# Altium PCB SB0037A.PcbDoc (part 3 of 7)
Units mil, origin at the board's own origin, x right, y up, seen from the top; angles counter-clockwise.
Board outline 2872.5 x 4560 mil, 6 copper layers (Top Layer, L2, L3, L4, L5, Bottom Layer), stack 30.268 mil thick; 282 components, 292 nets, 1320 pads, 687 vias.
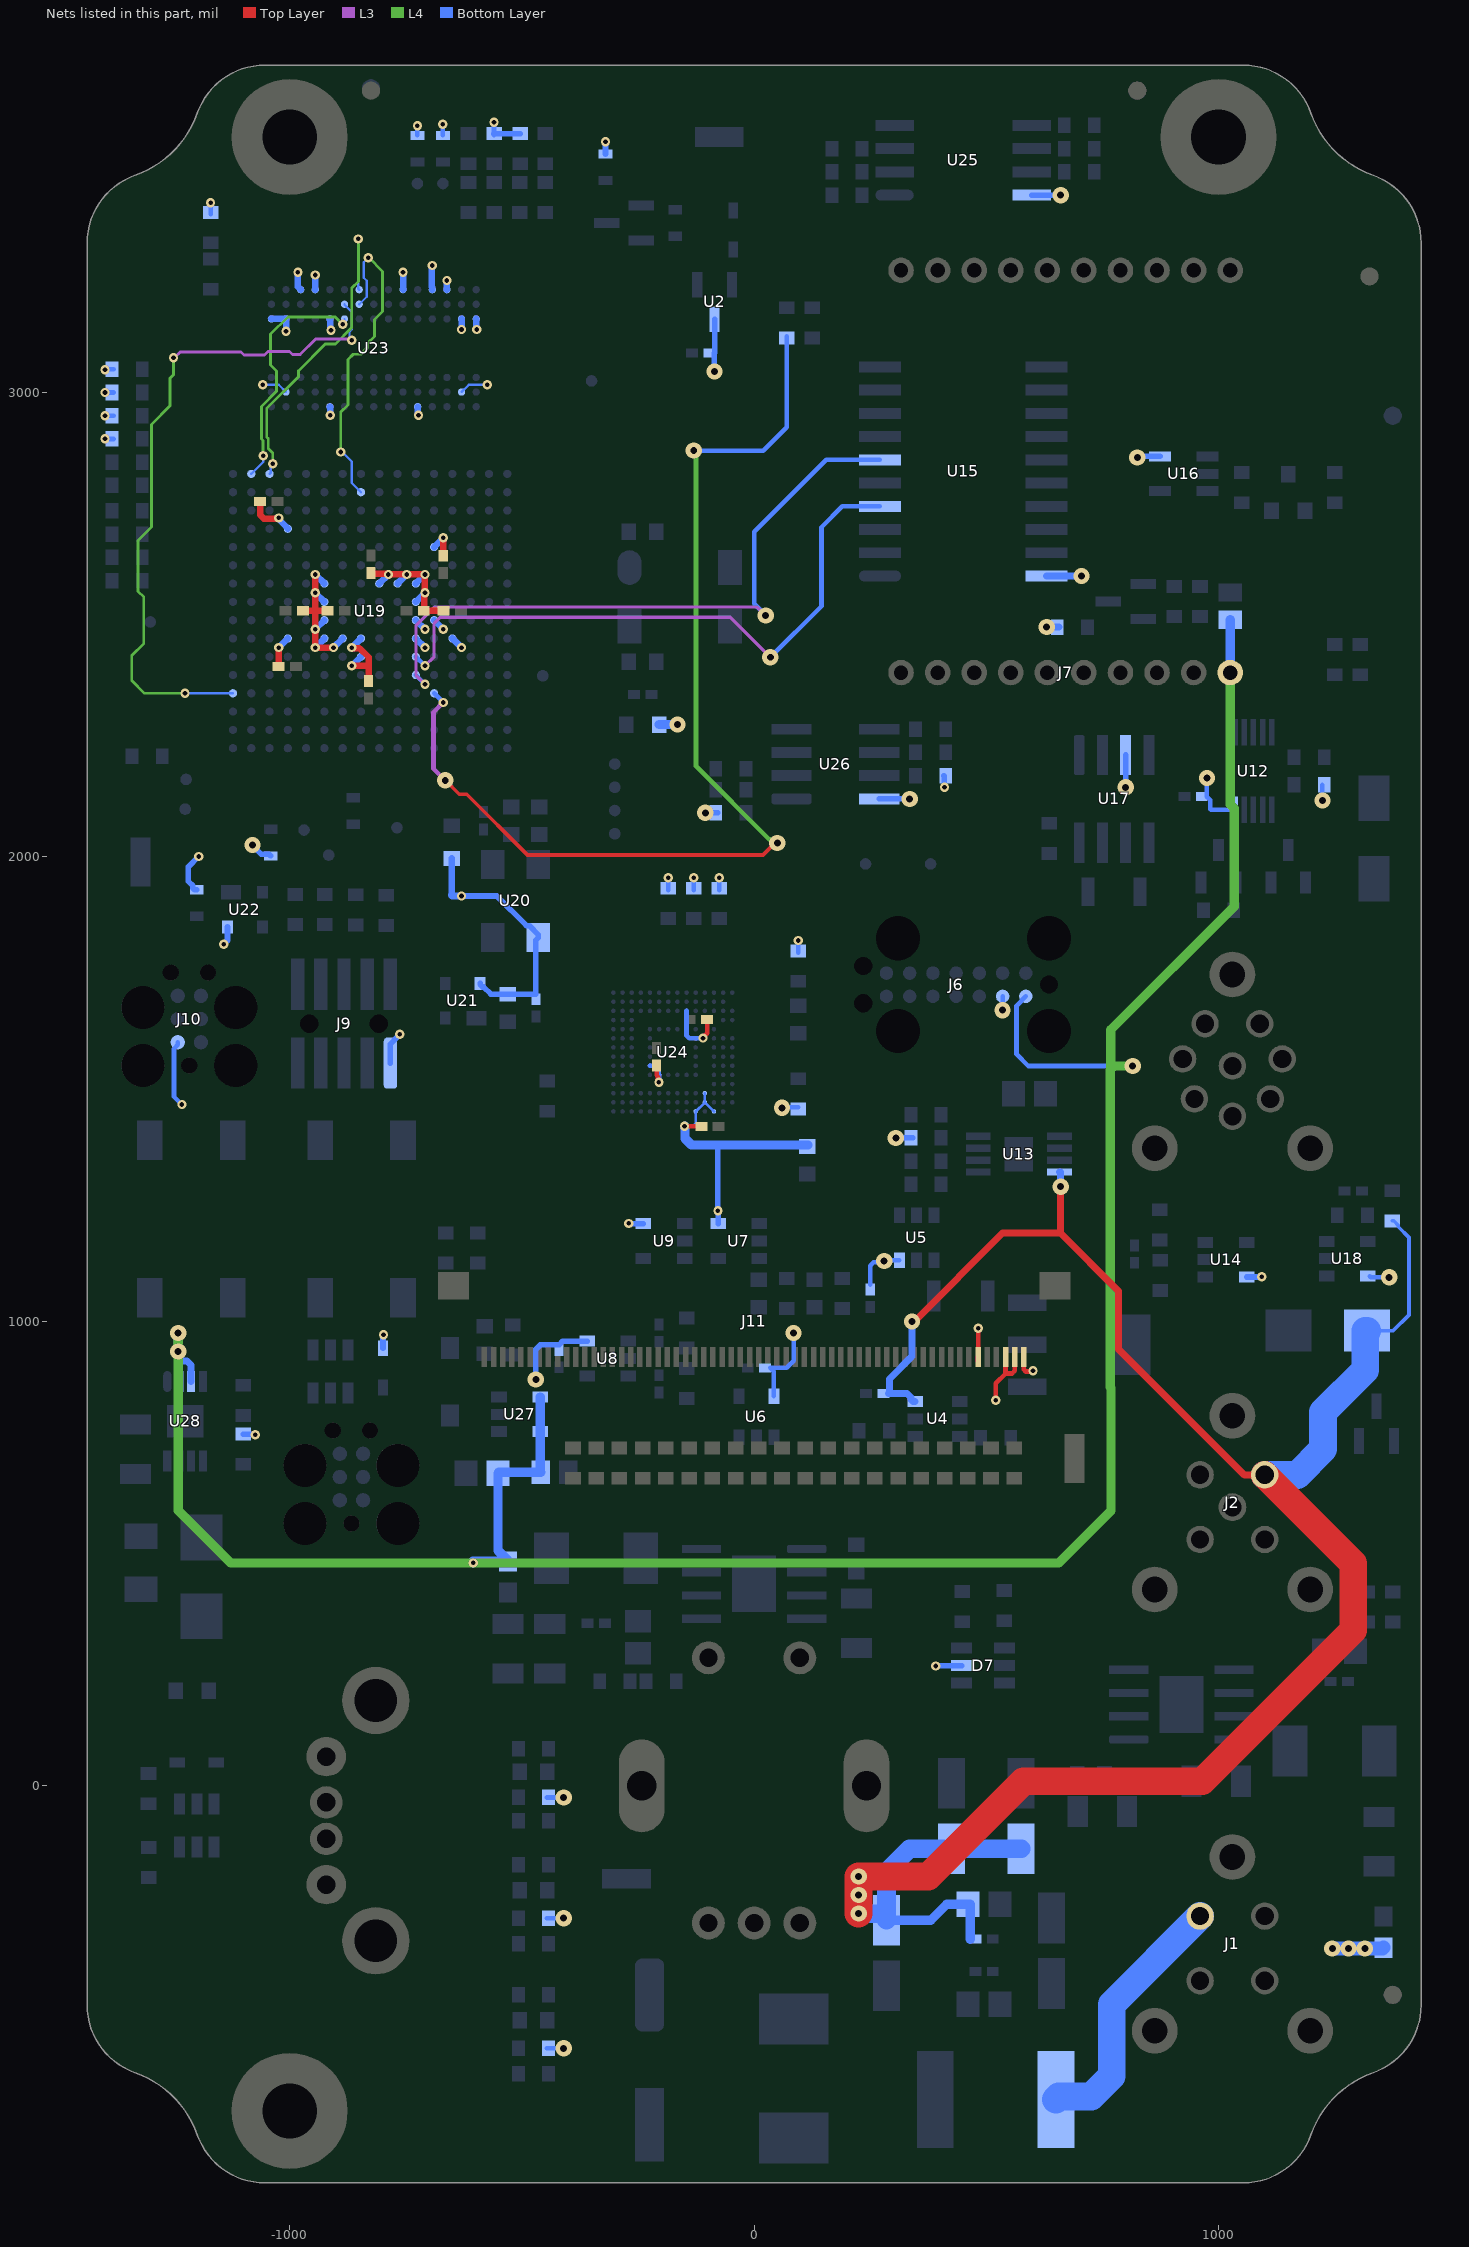
[diagram p6: the nets of this part, all layers, seen from the top]

## Part data (continued)
R10 R11 R15 R19 R21 R22 R23 R24 R27 R29 R40 R41 R42 R43 R45 R46 R47 R49 R50 R75 R76 R77 R78 R79 R80 R81 R89 R90 R118 R119: library part ERJ-3EKF1002V, "RES 10K OHM 1/10W 1% 0603 SMD", Limiting Element Voltage=75, Manufacturer="Panasonic Electronic Components", Maximum Overload Voltage=150, Maximum Working Voltage=31.6V, Package="0603 (1608 Metric)", Package Power="0603  (0.1W)", Power (Watts)="0.1W- 1/10W", Ratings=AEC-Q200, Sort Value=10000, Sort Value Package=603_10000, Supplier Package=0603, Supplier Part Number 1=P10.0KHCT-ND, Temperature Coefficient=±100ppm/°C, Tolerance=±1%, Category=Resistors, ComponentLink1Description="Internal Datasheet", ComponentLink1URL="datasheets\Panasonic Electronic Components\AOA0000CE2.pdf", ComponentLink2Description="External Datasheet", ComponentLink2URL=http://industrial.panasonic.com/www-data/pdf/AOA0000/AOA0000CE2.pdf, Composition="Thick Film", Features=-, Height=0.55MM, Manufacturer Part Number=ERJ-3EKF1002V, Number of Terminations=2, Packaging="Cut Tape (CT)", Resistance (Ohms)=10k, Size / Dimension="0.063\" L x 0.031\" W (1.60mm x 0.80mm)", Substitution Notes="10k , ±1% , 0603 , AEC-Q200", Supplier 1=Digi-Key
R12 R25 R26 R28: library part ERJ-3EKF1000V, "RES 100 OHM 1/10W 1% 0603 SMD", Limiting Element Voltage=75, Manufacturer="Panasonic Electronic Components", Maximum Overload Voltage=150, Maximum Working Voltage=3.2V, Package="0603 (1608 Metric)", Package Power="0603  (0.1W)", Power (Watts)="0.1W- 1/10W", Ratings=AEC-Q200, Sort Value Package=603_100, Supplier Package=0603, Supplier Part Number 1=P100HCT-ND, Temperature Coefficient=±100ppm/°C, Tolerance=±1%, Category=Resistors, ComponentLink1Description="Internal Datasheet", ComponentLink1URL="datasheets\Panasonic Electronic Components\AOA0000CE2.pdf", ComponentLink2Description="External Datasheet", ComponentLink2URL=http://industrial.panasonic.com/www-data/pdf/AOA0000/AOA0000CE2.pdf, Composition="Thick Film", Features=-, Height=0.55MM, Manufacturer Part Number=ERJ-3EKF1000V, Number of Terminations=2, Packaging="Cut Tape (CT)", Resistance (Ohms)=100, Size / Dimension="0.063\" L x 0.031\" W (1.60mm x 0.80mm)", Sort Value=100, Substitution Notes="100 , ±1% , 0603 , AEC-Q200", Supplier 1=Digi-Key
R16 R17 R68 R69 R70 R71 R72: library part ERJ-3EKF4701V, "RES 4.7K OHM 1/10W 1% 0603 SMD", Limiting Element Voltage=75, Manufacturer="Panasonic Electronic Components", Maximum Overload Voltage=150, Maximum Working Voltage=21.7V, Package="0603 (1608 Metric)", Package Power="0603  (0.1W)", Power (Watts)="0.1W- 1/10W", Ratings=AEC-Q200, Sort Value=4700, Sort Value Package=603_4700, Supplier Package=0603, Supplier Part Number 1=P4.70KHCT-ND, Temperature Coefficient=±100ppm/°C, Tolerance=±1%, Category=Resistors, ComponentLink1Description="Internal Datasheet", ComponentLink1URL="datasheets\Panasonic Electronic Components\AOA0000CE2.pdf", ComponentLink2Description="External Datasheet", ComponentLink2URL=http://industrial.panasonic.com/www-data/pdf/AOA0000/AOA0000CE2.pdf, Composition="Thick Film", Features=-, Height=0.55MM, Manufacturer Part Number=ERJ-3EKF4701V, Number of Terminations=2, Packaging="Cut Tape (CT)", Resistance (Ohms)=4.7k, Size / Dimension="0.063\" L x 0.031\" W (1.60mm x 0.80mm)", Substitution Notes="4.7k , ±1% , 0603 , AEC-Q200", Supplier 1=Digi-Key
R18: library part ERJ-3EKF3921V, "RES 3.92K OHM 1/10W 1% 0603 SMD", Limiting Element Voltage=75, Manufacturer="Panasonic Electronic Components", Maximum Overload Voltage=150, Maximum Working Voltage=19.8V, Package="0603 (1608 Metric)", Package Power="0603  (0.1W)", Power (Watts)="0.1W- 1/10W", Ratings=AEC-Q200, Sort Value=3920, Sort Value Package=603_3920, Supplier Package=0603, Supplier Part Number 1=P3.92KHCT-ND, Temperature Coefficient=±100ppm/°C, Tolerance=±1%, Category=Resistors, ComponentLink1Description="Internal Datasheet", ComponentLink1URL="datasheets\Panasonic Electronic Components\AOA0000CE2.pdf", ComponentLink2Description="External Datasheet", ComponentLink2URL=http://industrial.panasonic.com/www-data/pdf/AOA0000/AOA0000CE2.pdf, Composition="Thick Film", Features=-, Height=0.55MM, Manufacturer Part Number=ERJ-3EKF3921V, Number of Terminations=2, Packaging="Cut Tape (CT)", Resistance (Ohms)=3.92k, Size / Dimension="0.063\" L x 0.031\" W (1.60mm x 0.80mm)", Substitution Notes="3.92k , ±1% , 0603 , AEC-Q200", Supplier 1=Digi-Key
R39: library part ERJ-8ENF1200V, "RES 120 OHM 1/4W 1% 1206 SMD", Limiting Element Voltage=200, Manufacturer="Panasonic Electronic Components", Maximum Overload Voltage=400, Maximum Working Voltage=5.5V, Package="1206 (3216 Metric)", Package Power="1206  (0.25W)", Power (Watts)="0.25W- 1/4W", Ratings=AEC-Q200, Sort Value Package=1206_120, Supplier Package=1206, Supplier Part Number 1=P120FCT-ND, Temperature Coefficient=±100ppm/°C, Tolerance=±1%, Category=Resistors, ComponentLink1Description="Internal Datasheet", ComponentLink1URL="datasheets\Panasonic Electronic Components\AOA0000CE2.pdf", ComponentLink2Description="External Datasheet", ComponentLink2URL=http://industrial.panasonic.com/www-data/pdf/AOA0000/AOA0000CE2.pdf, Composition="Thick Film", Features=-, Height=0.70MM, Manufacturer Part Number=ERJ-8ENF1200V, Number of Terminations=2, Packaging="Cut Tape (CT)", Resistance (Ohms)=120, Size / Dimension="0.126\" L x 0.063\" W (3.20mm x 1.60mm)", Sort Value=120, Substitution Notes="120 , ±1% , 1206 , AEC-Q200", Supplier 1=Digi-Key
R48: library part ERJ-3EKF1202V, "RES 12K OHM 1/10W 1% 0603 SMD", Limiting Element Voltage=75, Manufacturer="Panasonic Electronic Components", Maximum Overload Voltage=150, Maximum Working Voltage=34.6V, Package="0603 (1608 Metric)", Package Power="0603  (0.1W)", Power (Watts)="0.1W- 1/10W", Ratings=AEC-Q200, Sort Value=12000, Sort Value Package=603_12000, Supplier Package=0603, Supplier Part Number 1=P12.0KHCT-ND, Temperature Coefficient=±100ppm/°C, Tolerance=±1%, Category=Resistors, ComponentLink1Description="Internal Datasheet", ComponentLink1URL="datasheets\Panasonic Electronic Components\AOA0000CE2.pdf", ComponentLink2Description="External Datasheet", ComponentLink2URL=http://industrial.panasonic.com/www-data/pdf/AOA0000/AOA0000CE2.pdf, Composition="Thick Film", Features=-, Height=0.55MM, Manufacturer Part Number=ERJ-3EKF1202V, Number of Terminations=2, Packaging="Cut Tape (CT)", Resistance (Ohms)=12k, Size / Dimension="0.063\" L x 0.031\" W (1.60mm x 0.80mm)", Substitution Notes="12k , ±1% , 0603 , AEC-Q200", Supplier 1=Digi-Key
R51 R52 R53 R54 R117: library part ERJ-3EKF2201V, "RES 2.2K OHM 1/10W 1% 0603 SMD", Limiting Element Voltage=75, Manufacturer="Panasonic Electronic Components", Maximum Overload Voltage=150, Maximum Working Voltage=14.8V, Package="0603 (1608 Metric)", Package Power="0603  (0.1W)", Power (Watts)="0.1W- 1/10W", Ratings=AEC-Q200, Sort Value=2200, Sort Value Package=603_2200, Supplier Package=0603, Supplier Part Number 1=P2.20KHCT-ND, Temperature Coefficient=±100ppm/°C, Tolerance=±1%, Category=Resistors, ComponentLink1Description="Internal Datasheet", ComponentLink1URL="datasheets\Panasonic Electronic Components\AOA0000CE2.pdf", ComponentLink2Description="External Datasheet", ComponentLink2URL=http://industrial.panasonic.com/www-data/pdf/AOA0000/AOA0000CE2.pdf, Composition="Thick Film", Features=-, Height=0.55MM, Manufacturer Part Number=ERJ-3EKF2201V, Number of Terminations=2, Packaging="Cut Tape (CT)", Resistance (Ohms)=2.2k, Size / Dimension="0.063\" L x 0.031\" W (1.60mm x 0.80mm)", Substitution Notes="2.2k , ±1% , 0603 , AEC-Q200", Supplier 1=Digi-Key
R83 R84 R85 R86 R87 R88 R91 R92 R93 R94: library part ERJ-3EKF33R0V, "RES 33 OHM 1/10W 1% 0603 SMD", Limiting Element Voltage=75, Manufacturer="Panasonic Electronic Components", Maximum Overload Voltage=150, Maximum Working Voltage=1.8V, Package="0603 (1608 Metric)", Package Power="0603  (0.1W)", Power (Watts)="0.1W- 1/10W", Ratings=AEC-Q200, Sort Value Package=603_33, Supplier Package=0603, Supplier Part Number 1=P33.0HCT-ND, Temperature Coefficient=±100ppm/°C, Tolerance=±1%, Category=Resistors, ComponentLink1Description="Internal Datasheet", ComponentLink1URL="datasheets\Panasonic Electronic Components\AOA0000CE2.pdf", ComponentLink2Description="External Datasheet", ComponentLink2URL=http://industrial.panasonic.com/www-data/pdf/AOA0000/AOA0000CE2.pdf, Composition="Thick Film", Features=-, Height=0.55MM, Manufacturer Part Number=ERJ-3EKF33R0V, Number of Terminations=2, Packaging="Cut Tape (CT)", Resistance (Ohms)=33, Size / Dimension="0.063\" L x 0.031\" W (1.60mm x 0.80mm)", Sort Value=33, Substitution Notes="33 , ±1% , 0603 , AEC-Q200", Supplier 1=Digi-Key
R95 R96 R97 R98 R99 R100 R101 R102 R103 R104 R105 R106 R107 R108 R109 R110 R111 R112 R113 R114: library part ERJ-3EKF51R0V, "RES 51 OHM 1/10W 1% 0603 SMD", Limiting Element Voltage=75, Manufacturer="Panasonic Electronic Components", Maximum Overload Voltage=150, Maximum Working Voltage=2.3V, Package="0603 (1608 Metric)", Package Power="0603  (0.1W)", Power (Watts)="0.1W- 1/10W", Ratings=AEC-Q200, Sort Value Package=603_51, Supplier Package=0603, Supplier Part Number 1=P51.0HCT-ND, Temperature Coefficient=±100ppm/°C, Tolerance=±1%, Category=Resistors, ComponentLink1Description="Internal Datasheet", ComponentLink1URL="datasheets\Panasonic Electronic Components\AOA0000CE2.pdf", ComponentLink2Description="External Datasheet", ComponentLink2URL=http://industrial.panasonic.com/www-data/pdf/AOA0000/AOA0000CE2.pdf, Composition="Thick Film", Features=-, Height=0.55MM, Manufacturer Part Number=ERJ-3EKF51R0V, Number of Terminations=2, Packaging="Cut Tape (CT)", Resistance (Ohms)=51, Size / Dimension="0.063\" L x 0.031\" W (1.60mm x 0.80mm)", Sort Value=51, Substitution Notes="51 , ±1% , 0603 , AEC-Q200", Supplier 1=Digi-Key
R115: library part ERJ-3EKF15R0V, "RES 15 OHM 1/10W 1% 0603 SMD", Limiting Element Voltage=75, Manufacturer="Panasonic Electronic Components", Maximum Overload Voltage=150, Maximum Working Voltage=1.2V, Package="0603 (1608 Metric)", Package Power="0603  (0.1W)", Power (Watts)="0.1W- 1/10W", Ratings=AEC-Q200, Sort Value Package=603_15, Supplier Package=0603, Supplier Part Number 1=P15.0HCT-ND, Temperature Coefficient=±100ppm/°C, Tolerance=±1%, Category=Resistors, ComponentLink1Description="Internal Datasheet", ComponentLink1URL="datasheets\Panasonic Electronic Components\AOA0000CE2.pdf", ComponentLink2Description="External Datasheet", ComponentLink2URL=http://industrial.panasonic.com/www-data/pdf/AOA0000/AOA0000CE2.pdf, Composition="Thick Film", Features=-, Height=0.55MM, Manufacturer Part Number=ERJ-3EKF15R0V, Number of Terminations=2, Packaging="Cut Tape (CT)", Resistance (Ohms)=15, Size / Dimension="0.063\" L x 0.031\" W (1.60mm x 0.80mm)", Sort Value=15, Substitution Notes="15 , ±1% , 0603 , AEC-Q200", Supplier 1=Digi-Key
R120 R121: library part ERJ-3EKF1502V, "RES 15K OHM 1/10W 1% 0603 SMD", Limiting Element Voltage=75, Manufacturer="Panasonic Electronic Components", Maximum Overload Voltage=150, Maximum Working Voltage=38.7V, Package="0603 (1608 Metric)", Package Power="0603  (0.1W)", Power (Watts)="0.1W- 1/10W", Ratings=AEC-Q200, Sort Value=15000, Sort Value Package=603_15000, Supplier Package=0603, Supplier Part Number 1=P15.0KHCT-ND, Temperature Coefficient=±100ppm/°C, Tolerance=±1%, Category=Resistors, ComponentLink1Description="Internal Datasheet", ComponentLink1URL="datasheets\Panasonic Electronic Components\AOA0000CE2.pdf", ComponentLink2Description="External Datasheet", ComponentLink2URL=http://industrial.panasonic.com/www-data/pdf/AOA0000/AOA0000CE2.pdf, Composition="Thick Film", Features=-, Height=0.55MM, Manufacturer Part Number=ERJ-3EKF1502V, Number of Terminations=2, Packaging="Cut Tape (CT)", Resistance (Ohms)=15k, Size / Dimension="0.063\" L x 0.031\" W (1.60mm x 0.80mm)", Substitution Notes="15k , ±1% , 0603 , AEC-Q200", Supplier 1=Digi-Key
TP1 TP2 TP7 TP8 TP9 TP10 TP11 TP12 TP13 TP14 TP15 TP16 TP17 TP18 TP19 TP20: library part "TP SMT 25MIL"
TP3 TP4 TP5 TP6: library part 5015, Color=-, Manufacturer="Keystone Electronics", Supplier Part Number 1=36-5015CT-ND, Category="Test and Measurement", ComponentLink1Description=http://mail.keyelco.com/ENG._DEPT/PDF%20CAT%20NO%20Drawings/5015.pdf, ComponentLink1URL=http://mail.keyelco.com/ENG._DEPT/PDF%20CAT%20NO%20Drawings/5015.pdf, Manufacturer Part Number=5015, Material="Phosphor Bronze", Mounting Type="Surface Mount", Packaging="Cut Tape (CT)", RoHS="RoHS Compliant", Supplier 1=Digi-Key, Terminal="0.010\" (0.25mm) Phosphor Bronze, Silver Plate", Type="PC Test Point, Miniature"
U1 U3: "SIMPLE SWITCHER® 3.8V to 36V, 3A Synchronous Buck Converter With Ultra-Low EMI 8-SO PowerPAD -40 to 125", Manufacturer="Texas Instruments", Max Input Voltage=36V, Max Operating Temperature=125°C, Max Output Voltage=24V, Min Input Voltage=3.8V, Min Operating Temperature=-40°C, Min Output Voltage=1V, Output Current=3A, Supplier Part Number 1=296-49765-1-ND, Switching Frequency=1.4MHz, Category="Integrated Circuits", CategorySort=600, ComponentLink1Description=http://www.ti.com/lit/ds/symlink/lmr33630.pdf?src-supplier=Digi-Key, ComponentLink1URL=http://www.ti.com/lit/ds/symlink/lmr33630.pdf?src-supplier=Digi-Key, ComponentLink2Description=http://www.ti.com/general/docs/suppproductinfo.tsp?distId=10&amp;gotoUrl=http%3A%2F%2Fwww.ti.com%2Flit%2Fgpn%2Flmr33630&src-supplier=Digi-Key, ComponentLink2URL=http://www.ti.com/general/docs/suppproductinfo.tsp?distId=10&amp;gotoUrl=http%3A%2F%2Fwww.ti.com%2Flit%2Fgpn%2Flmr33630&src-supplier=Digi-Key, Manufacturer Part Number=LMR33630BDDAR, Mount="Surface Mount", Number of Outputs=1, Number of Pins=8, Output Configuration=Positive, Output Type=Adjustable, Packaging 1="Tape and Reel", Pricing 1="1=2.21000, 10=1.98800, 25=1.87520, 100=1.50000, 250=1.31252, 500=1.27500, 1000=1.01250 (USD)", RoHS=No, Stock 1=1151, Supplier 1=Digi-Key, Synchronous Rectifier=Yes
U2: "IC SUPERVISOR 2.70V HIGH SOT23", Manufacturer="Microchip Technology", Number of Voltages Monitored=1, Operating Temperature="-40°C ~ 85°C", Package="SOT-23-3, TO-236-3, Micro3™, SSD3, SST3", Supplier Part Number 1=MCP810T-270I/TTCT-ND, Voltage - Threshold=2.625V, Category="Integrated Circuits", CategorySort=600, ComponentLink1Description=http://ww1.microchip.com/downloads/en/DeviceDoc/11194c.pdf, ComponentLink1URL=http://ww1.microchip.com/downloads/en/DeviceDoc/11194c.pdf, Manufacturer Part Number=MCP810T-270I/TT, Mounting Type="Surface Mount", Output="Push-Pull, Totem Pole", Packaging="Cut Tape (CT)", Pricing 1="1=0.54, 10=0.45, 25=0.37, 100=0.34 (USD)", Reset="Active High", Reset Timeout="150 ms Minimum", RoHS="RoHS Compliant", Stock 1=6831, Supplier 1=Digi-Key, Type="Simple Reset/Power-On Reset"
U4: "IC GATE DRVR IGBT/MOSFET SOT23-6", Current - Peak Output (Source, Sink)="2.5A, 5A", Logic Voltage - VIL, VIH="1.2V, 2.2V", Manufacturer="Texas Instruments", Operating Temperature="-40°C ~ 140°C (TJ)", Package / Case=SOT-23-6, Supplier Part Number 1=296-35613-1-ND, Voltage - Supply="10 V ~ 32 V", Category="Integrated Circuits (ICs)", Channel Type=Single, ComponentLink1Description=http://www.ti.com/lit/ds/symlink/ucc27531.pdf, ComponentLink1URL=http://www.ti.com/lit/ds/symlink/ucc27531.pdf, Driven Configuration="High-Side or Low-Side", Gate Type="IGBT, N-Channel MOSFET", Input Type=Non-Inverting, Manufacturer Part Number=UCC27531DBVT, Mounting Type="Surface Mount", Packaging="Cut Tape (CT)", Part Status=Active, Pricing 1="1=2.36, 10=2.121, 100=1.7047 (USD)", Rise / Fall Time (Typ)="15ns, 7ns", RoHS="RoHS Compliant", Stock 1=1544, Supplier 1=Digi-Key, Supplier Device Package=SOT-23-6
U5: "IC OPAMP CURR SENSE 6SOT", Case/Package=SOT-23-6, Input Bias Current=13uA, Input Offset Voltage (Vos)=900uV, Manufacturer="TI National Semiconductor", Max Operating Temperature=125°C, Max Supply Voltage=12V, Min Operating Temperature=-40°C, Min Supply Voltage=2.7V, Operating Supply Current=2.3mA, Package Quantity=1, Power Supply Rejection Ratio (PSRR)=85dB, Supplier Part Number 1=LMP8640MK-T/NOPBCT-ND, Voltage Gain=26.02dB, Bandwidth=950kHz, Common Mode Rejection Ratio=60dB, ComponentLink1Description=https://datasheet.ciiva.com/2965/lmp8640-2965988.pdf?src-supplier=Avnet, ComponentLink1URL=https://datasheet.ciiva.com/2965/lmp8640-2965988.pdf?src-supplier=Avnet, ComponentLink2Description=https://datasheet.ciiva.com/1802/lmp8640-1802437.pdf?src-supplier=Digi-Key, ComponentLink2URL=https://datasheet.ciiva.com/1802/lmp8640-1802437.pdf?src-supplier=Digi-Key, ComponentLink3Description=https://datasheet.ciiva.com/1802/lmp8640-1802438.pdf?src-supplier=Digi-Key, ComponentLink3URL=https://datasheet.ciiva.com/1802/lmp8640-1802438.pdf?src-supplier=Digi-Key, ComponentLink4Description=https://datasheet.ciiva.com/1802/lmp8640-1802439.pdf?src-supplier=Digi-Key, ComponentLink4URL=https://datasheet.ciiva.com/1802/lmp8640-1802439.pdf?src-supplier=Digi-Key, Contact Plating=Gold, Gain Bandwidth Product=950kHz, Lead Free="Lead Free", Manufacturer Part Number=LMP8640MK-T/NOPB, Mount="Surface Mount", Number of Amplifiers=1, Number of Channels=1, Number of Circuits=1, Number of Elements=1, Number of Pins=6, Packaging="Tape and Reel", Pricing 1="1=2.01000, 10=1.80100, 25=1.69960, 100=1.35960, 250=1.18964, 500=1.15566 (USD)", Radiation Hardening=No, REACH SVHC="No SVHC", RoHS=Yes, Slew Rate=1.8V/µs, Stock 1=12296, Supplier 1=Digi-Key, Weight=0.00127oz
U6: "Single high speed, low power comparator 5-SOT-23 -40 to 125", Case/Package=SOT-23-5, Input Bias Current=5nA, Input Offset Voltage (Vos)=5mV, Manufacturer="Texas Instruments", Max Operating Temperature=125°C, Max Supply Current=40uA, Max Supply Voltage=5.5V, Min Operating Temperature=-40°C, Min Supply Voltage=2.7V, Nominal Supply Current=50uA, Output Current=21mA, Package Quantity=3000, Power Supply Rejection Ratio (PSRR)=85dB, Supplier Part Number 1=296-36750-1-ND, Category=Comparators, Common Mode Rejection Ratio=70dB, ComponentLink1Description=https://datasheet.ciiva.com/12286/sbos561a-203450-12286704.pdf?src-supplier=Mouser, ComponentLink1URL=https://datasheet.ciiva.com/12286/sbos561a-203450-12286704.pdf?src-supplier=Mouser, ComponentLink2Description=https://datasheet.ciiva.com/29634/tlv3201-29634998.pdf?src-supplier=Digi-Key, ComponentLink2URL=https://datasheet.ciiva.com/29634/tlv3201-29634998.pdf?src-supplier=Digi-Key, ComponentLink3Description=https://datasheet.ciiva.com/29634/tlv3201-29634999.pdf?src-supplier=Digi-Key, ComponentLink3URL=https://datasheet.ciiva.com/29634/tlv3201-29634999.pdf?src-supplier=Digi-Key, ComponentLink4Description=https://datasheet.ciiva.com/29635/tlv3201-29635000.pdf?src-supplier=Digi-Key, ComponentLink4URL=https://datasheet.ciiva.com/29635/tlv3201-29635000.pdf?src-supplier=Digi-Key, ComponentLink5Description=https://datasheet.ciiva.com/2966/tlv3202-2966810.pdf?src-supplier=Avnet, ComponentLink5URL=https://datasheet.ciiva.com/2966/tlv3202-2966810.pdf?src-supplier=Avnet, ComponentLink6Description=https://octopart.com/click/track?ai=8629&ct=datasheets&sig=0da13b1&at=physicalpart&sid=370&ppid=22616100&hlid=24934711&src-supplier=TI+store, ComponentLink6URL=https://octopart.com/click/track?ai=8629&ct=datasheets&sig=0da13b1&at=physicalpart&sid=370&ppid=22616100&hlid=24934711&src-supplier=TI+store, ComponentLink7Description=http://datasheet.octopart.com/TLV3201AIDBVR-Texas-Instruments-datasheet-37140356.pdf?src-supplier=Newark, ComponentLink7URL=http://datasheet.octopart.com/TLV3201AIDBVR-Texas-Instruments-datasheet-37140356.pdf?src-supplier=Newark, ComponentLink8Description=http://datasheet.octopart.com/TLV3201AIDBVR-Texas-Instruments-datasheet-10947357.pdf?src-supplier=TI+store, ComponentLink8URL=http://datasheet.octopart.com/TLV3201AIDBVR-Texas-Instruments-datasheet-10947357.pdf?src-supplier=TI+store, ComponentLink9Description=http://datasheet.octopart.com/TLV3201AIDBVR-Texas-Instruments-datasheet-11515870.pdf?src-supplier=TI+store, ComponentLink9URL=http://datasheet.octopart.com/TLV3201AIDBVR-Texas-Instruments-datasheet-11515870.pdf?src-supplier=TI+store, ComponentLink10Description=http://sigma.octopart.com/49249325/technical_drawing/Texas-Instruments-TLV3201AIDBVR.pdf?src-supplier=TI+store, ComponentLink10URL=http://sigma.octopart.com/49249325/technical_drawing/Texas-Instruments-TLV3201AIDBVR.pdf?src-supplier=TI+store, ComponentLink11Description=http://sigma.octopart.com/102331370/technical_drawing/Texas-Instruments-TLV3201AIDBVR.pdf?src-supplier=TI+store, ComponentLink11URL=http://sigma.octopart.com/102331370/technical_drawing/Texas-Instruments-TLV3201AIDBVR.pdf?src-supplier=TI+store, ComponentLink12Description=http://datasheet.octopart.com/TLV3201AIDBVR-Texas-Instruments-datasheet-103689170.pdf?src-supplier=Newark, ComponentLink12URL=http://datasheet.octopart.com/TLV3201AIDBVR-Texas-Instruments-datasheet-103689170.pdf?src-supplier=Newark, ComponentLink13Description=http://datasheet.octopart.com/TLV3201AIDBVR-Texas-Instruments-datasheet-81455961.pdf?src-supplier=TME, ComponentLink13URL=http://datasheet.octopart.com/TLV3201AIDBVR-Texas-Instruments-datasheet-81455961.pdf?src-supplier=TME, Contact Plating=Gold, Hysteresis=1.2mV, Lead Free="Lead Free", Manufacturer Part Number=TLV3201AIDBVR, Max Input Current=5nA, Mount="Surface Mount", Number of Channels=1, Number of Elements=1, Number of Pins=5, Packaging="Tape and Reel", Pricing="1=1.36000, 10=1.21500, 25=1.15360, 100=0.88580, 250=0.78280, 500=0.74160, 1000=0.57680 (USD)", Propagation Delay=50ns, Quiescent Current=40uA, Radiation Hardening=No, REACH SVHC="No SVHC", Response Time=0.047us, Stock=27179, Supplier 1=Digi-Key, Type="General Purpose"
U7 U8 U9 U14 U18: "IC OPAMP GP 20MHZ RRO SOT23-5", Case/Package=SOT-23, Input Bias Current=10pA, Input Offset Voltage (Vos)=2mV, Manufacturer="Texas Instruments", Max Dual Supply Voltage=2.75V, Max Frequency=10MHz, Max Operating Temperature=125°C, Max Supply Voltage=5.5V, Min Dual Supply Voltage=900mV, Min Operating Temperature=-40°C, Min Supply Voltage=1.8V, Nominal Supply Current=1.5mA, Operating Supply Current=1.6mA, Output Current=65mA, Package Quantity=250, Power Supply Rejection Ratio (PSRR)=100dB, Supplier Part Number 1=296-29511-1-ND, Voltage Gain=130dB, Bandwidth=20MHz, Category="Amplifiers - Op Amps, Buffer, Instrumentation", Common Mode Rejection Ratio=90dB, ComponentLink1Description=https://datasheet.ciiva.com/1803/opa322-1803459.pdf?src-supplier=Digi-Key, ComponentLink1URL=https://datasheet.ciiva.com/1803/opa322-1803459.pdf?src-supplier=Digi-Key, ComponentLink2Description=https://datasheet.ciiva.com/7848/1481239-7848179.pdf?src-supplier=Element14, ComponentLink2URL=https://datasheet.ciiva.com/7848/1481239-7848179.pdf?src-supplier=Element14, ComponentLink3Description=https://datasheet.ciiva.com/1803/opa322-1803460.pdf?src-supplier=Digi-Key, ComponentLink3URL=https://datasheet.ciiva.com/1803/opa322-1803460.pdf?src-supplier=Digi-Key, ComponentLink4Description=https://datasheet.ciiva.com/1803/opa322-1803461.pdf?src-supplier=Digi-Key, ComponentLink4URL=https://datasheet.ciiva.com/1803/opa322-1803461.pdf?src-supplier=Digi-Key, ComponentLink5Description=https://datasheet.ciiva.com/14460/opa4322-14460092.pdf?src-supplier=Avnet, ComponentLink5URL=https://datasheet.ciiva.com/14460/opa4322-14460092.pdf?src-supplier=Avnet, ComponentLink6Description=https://datasheet.ciiva.com/48706/001071938-da-01-en-ic-opamp-gp-rr-opa322aidbvt-sot-23-5-tid-48706602.pdf?src-supplier=Conrad, ComponentLink6URL=https://datasheet.ciiva.com/48706/001071938-da-01-en-ic-opamp-gp-rr-opa322aidbvt-sot-23-5-tid-48706602.pdf?src-supplier=Conrad, Gain Bandwidth Product=20MHz, Height=1.3mm, Lead Free="Lead Free", Length=3.05mm, Manufacturer Part Number=OPA322AIDBVT, Max I/O Voltage=2mV, Nominal Gain Bandwidth Product=20MHz, Number of Amplifiers=1, Number of Channels=1, Number of Circuits=1, Number of Elements=1, Number of Pins=5, Operating Supply Voltage=2.75V, Output Current per Channel=65mA, Packaging="Tape and Reel", Pricing="1=1.66000, 10=1.49500, 25=1.41000, 100=1.12800 (USD)", Radiation Hardening=No, REACH SVHC="No SVHC", RoHS=Yes, Slew Rate=10V/µs, Stock=3683, Supplier 1=Digi-Key, Unity Gain Bandwidth Product=20MHz, Width=1.75mm
U10 U11: "TVS DIODE 12VWM/7VWM SOT23", Breakdown Voltage=13.3V, Case/Package=SOT-23, Clamping Voltage=26V, Leakage Current=1uA, Manufacturer=Semtech, Max Operating Temperature=125°C, Max Power Dissipation=400W, Max Reverse Leakage Current=20uA, Min Breakdown Voltage=7.5V, Min Operating Temperature=-55°C, Peak Pulse Current=17A, Power Line Protection=No, Reverse Standoff Voltage=12V, Supplier Part Number 1=SM712CT-ND, Test Current=1mA, ComponentLink1Description=https://datasheet.ciiva.com/16393/sm712-16393584.pdf, ComponentLink1URL=https://datasheet.ciiva.com/16393/sm712-16393584.pdf, ComponentLink2Description=https://datasheet.ciiva.com/339/sm712-339089.pdf, ComponentLink2URL=https://datasheet.ciiva.com/339/sm712-339089.pdf, ComponentLink3Description=https://datasheet.ciiva.com/339/sm712-339090.pdf, ComponentLink3URL=https://datasheet.ciiva.com/339/sm712-339090.pdf, ComponentLink4Description=https://datasheet.ciiva.com/339/sm712-339091.pdf, ComponentLink4URL=https://datasheet.ciiva.com/339/sm712-339091.pdf, ComponentLink5Description=https://datasheet.ciiva.com/18065/getdatasheetpartid-110620-18065348.pdf, ComponentLink5URL=https://datasheet.ciiva.com/18065/getdatasheetpartid-110620-18065348.pdf, ComponentLink6Description=https://datasheet.ciiva.com/25958/sm712-25958326.pdf, ComponentLink6URL=https://datasheet.ciiva.com/25958/sm712-25958326.pdf, ComponentLink7Description=https://datasheet.ciiva.com/5748/579001-5748455.pdf, ComponentLink7URL=https://datasheet.ciiva.com/5748/579001-5748455.pdf, ComponentLink8Description=https://datasheet.ciiva.com/8029/579001-8029931.pdf, ComponentLink8URL=https://datasheet.ciiva.com/8029/579001-8029931.pdf, Depth=1.3mm, Direction=Bidirectional, Element Configuration=Dual, ESD Protection=Yes, Height=0.95mm, Lead Free="Lead Free", Length=2.9mm, Manufacturer Part Number=SM712.TCT, Max Breakdown Voltage=13.3V, Mount="Surface Mount", Number of Bidirectional Channels=2, Number of Elements=2, Number of Pins=3, Packaging="Tape and Reel", Peak Pulse Power=400W, Polarity=Bidirectional, Power Dissipation=400W, Pricing 1="1=1.79, 10=1.615, 25=1.442, 100=1.2978, 250=1.1536, 500=1.0094, 1000=0.8364 (USD)", Radiation Hardening=No, REACH SVHC="No SVHC", Reverse Breakdown Voltage=13.3V, Stock 1=46130, Supplier 1=Digi-Key, Voltage Rating (DC)=12V, Width=1.3mm, Working Voltage=12V
U12: "IC TXRX RS422/485 20MBPS 10MSOP", Manufacturer=Intersil, Operating Temperature="-40°C ~ 85°C", Package / Case="10-TFSOP, 10-MSOP (0.118\", 3.00mm Width)", Supplier Device Package=10-MSOP, Supplier Part Number 1=ISL3176EIUZ-TCT-ND, Voltage - Supply="3 V ~ 3.6 V", Category="Integrated Circuits (ICs)", ComponentLink1Description=http://www.intersil.com/content/dam/intersil/documents/isl3/isl3170e-71e-72e-73e-74e-75e-76e-77e-78e.pdf, ComponentLink1URL=http://www.intersil.com/content/dam/intersil/documents/isl3/isl3170e-71e-72e-73e-74e-75e-76e-77e-78e.pdf, Data Rate=20Mbps, Duplex=Full, Manufacturer Part Number=ISL3176EIUZ-T, Mounting Type="Surface Mount", Number of Drivers/Receivers=1/1, Packaging="Cut Tape (CT)", Part Status=Active, Pricing 1="1=1.79, 10=1.61, 100=1.2944, 500=1.06348, 1000=0.88117 (USD)", Protocol="RS422, RS485", RoHS="RoHS Compliant", Stock 1=9164, Supplier 1=Digi-Key, Type=Transceiver
U13: "SINGLE CHANNEL HIGH SIDE POWER S", Manufacturer="Texas Instruments", Max Operating Temperature=125°C, Min Operating Temperature=-40°C, Supplier Part Number 1=296-50416-1-ND, Category="Integrated Circuits", CategorySort=600, ComponentLink1Description=http://www.ti.com/lit/ds/symlink/tps1h200a-q1.pdf?src-supplier=Digi-Key, ComponentLink1URL=http://www.ti.com/lit/ds/symlink/tps1h200a-q1.pdf?src-supplier=Digi-Key, Manufacturer Part Number=TPS1H200AQDGNRQ1, Number of Channels=1, Pricing 1="1 = 1.59000, 10 = 1.43000, 100 = 1.14960, 500 = 0.94452, 1000 = 0.78259 (USD)", RoHS=No, Stock 1=8489, Supplier 1=Digi-Key
U15: "IC BUFF/DVR TRI-ST DUAL 20SOIC", Current - Output High, Low="7.8mA, 7.8mA", Manufacturer="Texas Instruments", Operating Temperature="-40°C ~ 85°C", Package="20-SOIC (0.300\", 7.50mm Width)", Supplier Device Package=20-SOIC, Supplier Part Number 1=296-1196-1-ND, Voltage - Supply="2 V ~ 6 V", Category="Integrated Circuits", CategorySort=600, ComponentLink1Description=http://focus.ti.com/lit/ds/symlink/sn74hc244.pdf, ComponentLink1URL=http://focus.ti.com/lit/ds/symlink/sn74hc244.pdf, Logic Type="Buffer/Line Driver, Non-Inverting", Manufacturer Part Number=SN74HC244DWR, Mounting Type="Surface Mount", Number of Bits per Element=4, Number of Elements=2, Packaging="Cut Tape (CT)", Pricing 1="1=0.58, 25=0.4044, 100=0.3465, 250=0.29924, 500=0.25726, 1000=0.1995 (USD)", RoHS="RoHS Compliant", Stock 1=40951, Supplier 1=Digi-Key
U16: "IC SINGLE INVERTER GATE SOT23-5", Current - Output High, Low="8mA, 8mA", Manufacturer="Texas Instruments", Operating Temperature="-40°C ~ 85°C", Package="SC-74A, SOT-753", Supplier Device Package=SOT-23-5, Supplier Part Number 1=296-1089-1-ND, Voltage - Supply="2 V ~ 5.5 V", Category="Integrated Circuits", CategorySort=600, ComponentLink1Description=http://focus.ti.com/lit/ds/symlink/sn74ahc1g04.pdf, ComponentLink1URL=http://focus.ti.com/lit/ds/symlink/sn74ahc1g04.pdf, Logic Type=Inverter, Manufacturer Part Number=SN74AHC1G04DBVR, Mounting Type="Surface Mount", Number of Circuits=1, Number of Inputs=1, Packaging="Cut Tape (CT)", Pricing 1="1=0.53, 25=0.31, 100=0.25, 250=0.18, 500=0.145, 1000=0.1125 (USD)", RoHS="RoHS Compliant", Stock 1=45111, Supplier 1=Digi-Key
U17: "CAN Interface IC STANDBY MODE", Manufacturer="Texas Instruments", Maximum Operating Temperature="+ 85 C", Minimum Operating Temperature="- 40 C", Operating Supply Voltage="3.3 V", Package=SOIC-8, Supplier Part Number 1=595-SN65HVD230DR, Supply Voltage - Max="3.6 V", Supply Voltage - Min="3 V", Category="Integrated Circuits", CategorySort=600, ComponentLink1Description=http://www.ti.com/litv/slos346k, ComponentLink1URL=http://www.ti.com/litv/slos346k, Data Rate="1 Mbps", Manufacturer Part Number=SN65HVD230DR, Minimum Order Quantity=1, Mounting Style=SMD/SMT, Packaging=Reel, Pricing 1="1=1.95, 10=1.62, 25=1.44, 100=0.972, 250=0.954, 500=0.935, 750=0.917, 2500=0.900 (USD)", Product Category="Display Interface", Reeling=True, RoHS="RoHS Compliant", RoHS - Mouser=Y, Series=SN65HVD230, Standard Pack Qty=2500, Stock 1=6781, Supplier 1=Mouser, Type=Transceiver
U19: "ARM Microcontrollers - MCU CortexM0/4 32bit 1MB Cortex-M4/M0", Manufacturer="NXP Semiconductors", Maximum Clock Frequency="204 MHz", Maximum Operating Temperature="+ 85 C", Minimum Operating Temperature="- 40 C", Operating Supply Voltage="2.2 V to 3.6 V", Package=LBGA-256, Supplier Part Number 1=568-11712-ND, Category="Integrated Circuits", CategorySort=600, ComponentLink1Description=http://www.nxp.com/documents/data_sheet/LPC4357_53_37_33.pdf, ComponentLink1URL=http://www.nxp.com/documents/data_sheet/LPC4357_53_37_33.pdf, Core="ARM Cortex M4/M0", Data Bus Width="32 bit", Data RAM Size="136 KB", Manufacturer Part Number=LPC43S57JET256E, Minimum Order Quantity=1, Mounting Style=SMD/SMT, On-Chip ADC=Yes, Packaging=Tray, Pricing 1="1=14.40, 25=13.31, 100=12.24, 250=11.16, 500=10.43, 1000=9.57 (USD)", Processor Series=LPC4357, Product Status="New Technology", Program Memory Size="1 MB", Reeling=False, RoHS="RoHS Compliant", RoHS - Mouser=Y, Standard Pack Qty=90, Stock 1=108, Supplier 1=Digi-Key, Tradename=LPC
U20: "OSC TCXO 12.00MHZ HCMOS SMD", Current - Supply (Disable) (Max)=-, Current - Supply (Max)=6mA, Frequency=12MHz, Frequency Stability=±2.5ppm, Manufacturer="Fox Electronics", Operating Temperature="-30°C ~ 85°C", Package="4-SMD, No Lead (DFN, LCC)", Supplier Part Number 1=631-1068-1-ND, Voltage - Supply=3.3V, Category="Integrated Circuits", CategorySort=600, ComponentLink1Description=http://www.foxonline.com/pdfs/fox924.pdf, ComponentLink1URL=http://www.foxonline.com/pdfs/fox924.pdf, Function=-, Height="0.059\" (1.50mm)", Manufacturer Part Number=FOX924B-12.000, Mounting Type="Surface Mount", Output=HCMOS, Packaging="Cut Tape (CT)", Pricing 1="1=3.76, 10=3.591, 50=3.403, 100=3.0438, 500=2.8728 (USD)", Ratings=-, RoHS="RoHS Compliant", Size / Dimension="0.197\" L x 0.126\" W (5.00mm x 3.20mm)", Stock 1=2663, Supplier 1=Digi-Key, Type=TCXO
U21 U22: "TVS DIODE 5.5VWM SOT143B", Capacitance @ Frequency="1pF @ 1MHz", Current - Peak Pulse (10/1000µs)=-, Manufacturer="NXP Semiconductors", Operating Temperature="-40°C ~ 85°C (TA)", Package / Case="TO-253-4, TO-253AA", Power Line Protection=Yes, Supplier Device Package=SOT-143B, Supplier Part Number 1=568-4140-1-ND, Voltage - Breakdown (Min)=6V, Voltage - Reverse Standoff (Typ)="5.5V (Max)", Applications="General Purpose", Bidirectional Channels=2, Category="Circuit Protection", ComponentLink1Description=http://www.nxp.com/documents/data_sheet/PRTR5V0U2X.pdf, ComponentLink1URL=http://www.nxp.com/documents/data_sheet/PRTR5V0U2X.pdf, Manufacturer Part Number=PRTR5V0U2X,215, Mounting Type="Surface Mount", Packaging="Cut Tape (CT)", Power - Peak Pulse=-, Pricing="1=0.57, 10=0.477, 25=0.418, 100=0.3578, 250=0.31036, 500=0.26286, 1000=0.20265 (USD)", RoHS="RoHS Compliant", Stock=11734, Supplier 1=Digi-Key, Type="Steering (Rail to Rail)", Unidirectional Channels=-, Voltage - Clamping (Max) @ Ipp=-
U23: "IC DRAM 256M PARALLEL 90TFBGA", Case/Package=TFBGA, Frequency=166MHz, Manufacturer=ISSI, Max Operating Temperature=85°C, Min Operating Temperature=-40°C, Supplier Part Number 1=706-1451-ND, Category="Integrated Circuits", CategorySort=600, ComponentLink1Description=http://www.mouser.com/ds/2/198/42-45S32800J-706492.pdf?src-supplier=Mouser, ComponentLink1URL=http://www.mouser.com/ds/2/198/42-45S32800J-706492.pdf?src-supplier=Mouser, ComponentLink2Description=http://www.issi.com/WW/pdf/42-45S32800J.pdf?src-supplier=Avnet, ComponentLink2URL=http://www.issi.com/WW/pdf/42-45S32800J.pdf?src-supplier=Avnet, ComponentLink3Description=http://www.issi.com/WW/pdf/42-45S32800J.pdf?src-supplier=Digi-Key, ComponentLink3URL=http://www.issi.com/WW/pdf/42-45S32800J.pdf?src-supplier=Digi-Key, Interface=Parallel, Manufacturer Part Number=IS42S32800J-6BLI, Memory Type=RAM,SDRAM, Packaging 1=Tray, Pricing 1="1=8.98000, 10=8.26100, 25=8.08960, 50=8.06100, 100=7.23150, 250=7.01224, 500=6.66904, 1000=6.43545 (USD)", RoHS=Yes, Stock 1=49, Supplier 1=Digi-Key
U24: "eMMC eMMC seq 300/40 IOPs 7800/8000", Manufacturer=SanDisk, Supplier Part Number 1=467-SDINBDG4-8G-I1, Brand=SanDisk, Category="Integrated Circuits", CategorySort=600, ComponentLink1Description=http://www.mouser.com/datasheet/2/669/sandisk_09132017_SanDisk_COM-AUTO-INDUST_DISTI_LIN-1145140.pdf, ComponentLink1URL=http://www.mouser.com/datasheet/2/669/sandisk_09132017_SanDisk_COM-AUTO-INDUST_DISTI_LIN-1145140.pdf, Manufacturer Part Number=SDINBDG4-8G-I1, Memory Size="8 GB", Minimum Order Quantity=1, Moisture Sensitive=Yes, Pricing 1="1=9.57, 5=9.03, 10=8.76, 25=8.65, 50=8.61, 100=8.33, 250=8.12, 500=7.95, 1000=7.86 (USD)", Product Status="New Product", Product Type=eMMC, Reeling=False, RoHS="RoHS Compliant", RoHS - Mouser=Y, Series="iNAND 7250", Standard Pack Qty=152, Stock 1=2925, Subcategory="Memory & Data Storage", Supplier 1=Mouser, Tradename=iNAND
U25: "IC FLASH 128M SPI 133MHZ 8SOIC", Manufacturer=Winbond, Supplier Part Number 1=W25Q128JVSIMCT-ND, Category="Integrated Circuits", CategorySort=600, ComponentLink1Description=http://www.winbond.com/resource-files/w25q128jv_dtr%20revc%2003272018%20plus.pdf?src-supplier=Digi-Key, ComponentLink1URL=http://www.winbond.com/resource-files/w25q128jv_dtr%20revc%2003272018%20plus.pdf?src-supplier=Digi-Key, Manufacturer Part Number=W25Q128JVSIMTR, Pricing 1="1=1.62000, 10=1.47500, 25=1.43560, 50=1.42800, 100=1.27650, 250=1.27272, 500=1.25378, 1000=1.20000 (USD)", RoHS=No, Stock 1=44076, Supplier 1=Digi-Key
U26: "IC FRAM 64K SPI 20MHZ 8SOIC", Case/Package=SOIC, Frequency=20MHz, Manufacturer=Cypress, Max Operating Temperature=85°C, Max Supply Voltage=3.65V, Min Operating Temperature=-40°C, Min Supply Voltage=2.7V, Nominal Supply Current=3mA, Operating Supply Voltage=3.3V, Package Quantity=100, Supplier Part Number 1=428-3206-ND, Access Time=20ns, Category="Integrated Circuits", CategorySort=600, ComponentLink1Description=https://datasheet.ciiva.com/26942/getdatasheetpartid-672928-26942246.pdf?src-supplier=Verical, ComponentLink1URL=https://datasheet.ciiva.com/26942/getdatasheetpartid-672928-26942246.pdf?src-supplier=Verical, ComponentLink2Description=https://datasheet.ciiva.com/12072/fm25cl64b-001-84477-0e-v-477223-12072828.pdf?src-supplier=Mouser, ComponentLink2URL=https://datasheet.ciiva.com/12072/fm25cl64b-001-84477-0e-v-477223-12072828.pdf?src-supplier=Mouser, ComponentLink3Description=https://datasheet.ciiva.com/6614/docid-47959-6614270.pdf?src-supplier=Digi-Key, ComponentLink3URL=https://datasheet.ciiva.com/6614/docid-47959-6614270.pdf?src-supplier=Digi-Key, Contact Plating=Tin, Data Bus Width=8b, Density=64Kb, Height=1.478mm, Interface=SPI, Lead Free="Lead Free", Length=4.98mm, Manufacturer Part Number=FM25CL64B-G, Memory Size=64Kb, Memory Type=RAM, Mount="Surface Mount", Number of Pins=8, Number of Words=8000, Packaging 1=Rail/Tube, Pricing 1="1=3.67000, 10=3.32800, 25=3.25640, 50=3.23820, 100=2.90400, 485=2.89322, 970=2.69456, 1455=2.64940 (USD)", Radiation Hardening=No, REACH SVHC="No SVHC", RoHS=Yes, Stock 1=2473, Supplier 1=Digi-Key, Weight=0.019048oz, Width=3.987mm, Word Size=8b
U27: "IC LED DRIVER RGLTR DIM TSOT23-5", Case/Package=TSOT, Current Rating=30mA, Frequency=1.3MHz, High Level Output Current=40mA, Manufacturer="ON Semiconductor", Max Input Voltage=5.5V, Max Operating Temperature=85°C, Max Output Voltage=38V, Max Supply Current=1.5mA, Min Input Voltage=2V, Min Operating Temperature=-40°C, Min Output Voltage=0uV, Min Supply Voltage=2.8V, Output Current=450mA, Package Quantity=1, Supplier Part Number 1=CAT4238TD-GT3CT-ND, Switching Frequency=1MHz, Category="Embedded Processors and Controllers", ComponentLink1Description=https://datasheet.ciiva.com/4426/cat4238-d-109064-4426950.pdf?src-supplier=Mouser, ComponentLink1URL=https://datasheet.ciiva.com/4426/cat4238-d-109064-4426950.pdf?src-supplier=Mouser, ComponentLink2Description=https://datasheet.ciiva.com/1552/83817-1552601.pdf?src-supplier=Farnell, ComponentLink2URL=https://datasheet.ciiva.com/1552/83817-1552601.pdf?src-supplier=Farnell, ComponentLink3Description=https://datasheet.ciiva.com/15135/getdatasheetpartid-558497-15135587.pdf?src-supplier=Verical, ComponentLink3URL=https://datasheet.ciiva.com/15135/getdatasheetpartid-558497-15135587.pdf?src-supplier=Verical, ComponentLink4Description=https://datasheet.ciiva.com/5775/cat4238-d-5775332.pdf?src-supplier=Farnell, ComponentLink4URL=https://datasheet.ciiva.com/5775/cat4238-d-5775332.pdf?src-supplier=Farnell, ComponentLink5Description=https://datasheet.ciiva.com/26878/cat4238td-gt3-26878318.pdf?src-supplier=IIIC, ComponentLink5URL=https://datasheet.ciiva.com/26878/cat4238td-gt3-26878318.pdf?src-supplier=IIIC, ComponentLink6Description=https://datasheet.ciiva.com/16387/cat4238-d-16387237.pdf?src-supplier=Future+Electronics, ComponentLink6URL=https://datasheet.ciiva.com/16387/cat4238-d-16387237.pdf?src-supplier=Future+Electronics, ComponentLink7Description=https://datasheet.ciiva.com/1945/cat4238-d-1945306.pdf?src-supplier=Digi-Key, ComponentLink7URL=https://datasheet.ciiva.com/1945/cat4238-d-1945306.pdf?src-supplier=Digi-Key, ComponentLink8Description=https://datasheet.ciiva.com/46408/cat4238-d-46408090.pdf?src-supplier=Element14, ComponentLink8URL=https://datasheet.ciiva.com/46408/cat4238-d-46408090.pdf?src-supplier=Element14, ComponentLink9Description=https://datasheet.ciiva.com/1945/cat4238-d-1945307.pdf?src-supplier=Digi-Key, ComponentLink9URL=https://datasheet.ciiva.com/1945/cat4238-d-1945307.pdf?src-supplier=Digi-Key, ComponentLink10Description=https://datasheet.ciiva.com/26062/cat4238-d-26062715.pdf?src-supplier=Avnet+Europe, ComponentLink10URL=https://datasheet.ciiva.com/26062/cat4238-d-26062715.pdf?src-supplier=Avnet+Europe, ComponentLink11Description=https://datasheet.ciiva.com/1497/cat4238-d-1497804.pdf?src-supplier=Element14, ComponentLink11URL=https://datasheet.ciiva.com/1497/cat4238-d-1497804.pdf?src-supplier=Element14, ComponentLink12Description=https://datasheet.ciiva.com/1945/cat4238-d-1945308.pdf?src-supplier=Digi-Key, ComponentLink12URL=https://datasheet.ciiva.com/1945/cat4238-d-1945308.pdf?src-supplier=Digi-Key, ComponentLink13Description=https://datasheet.ciiva.com/3165/cat4238-d-3165884.pdf?src-supplier=Avnet, ComponentLink13URL=https://datasheet.ciiva.com/3165/cat4238-d-3165884.pdf?src-supplier=Avnet, ComponentLink14Description=https://datasheet.ciiva.com/7650/83817-7650460.pdf?src-supplier=Element14, ComponentLink14URL=https://datasheet.ciiva.com/7650/83817-7650460.pdf?src-supplier=Element14, Contact Plating=Gold, Efficiency=87%, Halogen Free="Halogen Free", Lead Free="Lead Free", Manufacturer Part Number=CAT4238TD-GT3, Max Supply Voltage=5.5V, Nominal Supply Current=1.5mA, Number of Outputs=1, Number of Pins=5, Number of Segments=10, Output Current per Channel=40mA, Output Voltage=38V, Packaging="Tape and Reel", Pricing="1=1.08000, 10=0.96100, 100=0.70040, 500=0.58642, 1000=0.45611 (USD)", Radiation Hardening=No, REACH SVHC="No SVHC", RoHS=Yes, Stock=29128, Supplier 1=Digi-Key, Termination=SMD/SMT, Topology=Boost
U28: "IC USB SWITCH 2.45A CURR 8MSOP", Case/Package=MSOP, Manufacturer=Diodes, Max Input Voltage=6V, Max Operating Temperature=85°C, Max Output Current=2A, Min Input Voltage=2.5V, Min Operating Temperature=-35°C, Operating Supply Current=45uA, Package Quantity=2500, Quiescent Current=55uA, Supplier Part Number 1=AP2111MPG-13DICT-ND, Accuracy=1.5%, Category="Integrated Circuits", CategorySort=600, ComponentLink1Description=https://datasheet.ciiva.com/3234/ap2101-2111-3234512.pdf?src-supplier=Avnet, ComponentLink1URL=https://datasheet.ciiva.com/3234/ap2101-2111-3234512.pdf?src-supplier=Avnet, ComponentLink2Description=https://datasheet.ciiva.com/15108/getdatasheetpartid-661766-15108856.pdf?src-supplier=Verical, ComponentLink2URL=https://datasheet.ciiva.com/15108/getdatasheetpartid-661766-15108856.pdf?src-supplier=Verical, ComponentLink3Description=https://datasheet.ciiva.com/1962/ap2101-2111-1962212.pdf?src-supplier=Digi-Key, ComponentLink3URL=https://datasheet.ciiva.com/1962/ap2101-2111-1962212.pdf?src-supplier=Digi-Key, ComponentLink4Description=https://datasheet.ciiva.com/12183/ap2101-2111-12183962.pdf?src-supplier=Mouser, ComponentLink4URL=https://datasheet.ciiva.com/12183/ap2101-2111-12183962.pdf?src-supplier=Mouser, Contact Plating=Tin,Matte, Fault Protection="Over Temperature,Reverse Current", Interface=On/Off, Lead Free="Lead Free", Manufacturer Part Number=AP2111MPG-13, Mount="Surface Mount", Number of Outputs=1, Number of Pins=8, Output Configuration="High Side", Output Type=Fixed, Packaging 1="Tape and Reel", Pricing 1="1=0.46000, 10=0.39000, 100=0.29120, 500=0.22880, 1000=0.17680 (USD)", Radiation Hardening=No, REACH SVHC="No SVHC", RoHS=Yes, Stock 1=1715, Supplier 1=Digi-Key
Y1: "CRYSTAL 32.768KHZ 12.5PF SMD", ESR (Equivalent Series Resistance)="50 kOhm", Frequency=32.768kHz, Frequency Stability=-, Frequency Tolerance=±20ppm, Load Capacitance=12.5pF, Manufacturer="ECS Inc", Operating Mode=Fundamental, Operating Temperature="-40°C ~ 85°C", Package="4-SOJ, 5.50mm pitch", Supplier Part Number 1=XC1195CT-ND, Category="Integrated Circuits", CategorySort=600, ComponentLink1Description=http://www.ecsxtal.com/store/pdf/ecx-306x.pdf, ComponentLink1URL=http://www.ecsxtal.com/store/pdf/ecx-306x.pdf, Height="0.098\" (2.50mm)", Manufacturer Part Number=ECS-.327-12.5-17X-TR, Mounting Type="Surface Mount", Packaging="Cut Tape (CT)", Pricing 1="1=1.31, 10=1.138, 50=0.9976, 100=0.7875, 500=0.665, 1000=0.525 (USD)", Ratings=-, RoHS="RoHS Compliant", Size / Dimension="0.315\" L x 0.150\" W (8.00mm x 3.80mm)", Stock 1=17619, Supplier 1=Digi-Key, Type="kHz Crystal (Tuning Fork)"

## Free pads (board coordinates)
  round 250 hole 118: MH(-1000,-700) MH(-1000,3550) MH(1000,3550)

## Via types
v1: diameter 20, hole 10, Top Layer to Bottom Layer, tented both sides, 484 vias
v2: diameter 35, hole 15, Top Layer to Bottom Layer, tented both sides, 197 vias
v3: diameter 20, hole 10, Top Layer to Bottom Layer, tented top, 6 vias

## Nets (pads, with @x,y where several pads share a name; then routed paths per layer and width w, separated by ;. In a path a pad name is that pad's centre, name@x,y a point inside that pad or via, vN(x,y) a via of type N, cw(c..) or ccw(c..) an arc to the next point about the centre after c; other vN are vias at no path point)
12V_IN: F1.1 J1.1 | length 564.2
  Bottom Layer w60: F1.1@649.92,-675 655.78,-669.14 725.86,-669.14 770,-625 770,-470.53 J1.1@960.2,-280.33
+3V3: C12.1 C20.1 C21.1 C24.1 C27.2 C38.2 C39.2 C43.2 C44.2 C45.2 C46.2 C47.2 C48.2 C49.2 C50.2 C51.2 C52.2 C53.2 C54.2 C55.2 D7.5 D9.1 J3.2 J6.2 J9.1 J10.1 J11.1 J11.2 J11.3 J11.6 L7.2 L8.2 R13.1 R15.2 R22.2 R23.2 R24.2 R31.2 R42.1 R43.1 R45.2 R46.2 R49.2 R55.1 R56.1 R57.1 R58.1 R65.2 R66.2 R67.2 R76.2 R77.2 R78.2 R79.2 R80.2 R89.1 R90.2 R118.2 U2.3 U5.6 U6.5 U7.5 U8.5 U9.5 U12.10 U14.5 U15.20 U16.5 U17.3 U18.5 U19.D7 U19.E8 U19.E12 U19.F7 U19.F8 U19.F9 U19.F10 U19.G10 U19.H10 U19.J6 U19.J7 U19.K7 U19.L7 U19.L8 U19.L9 U19.L10 U19.N7 U19.N13 U20.4 U21.4 U22.4 U23.A7 U23.B2 U23.B7 U23.C9 U23.D9 U23.E1 U23.F9 U23.L1 U23.L7 U23.M9 U23.N9 U23.P2 U23.P7 U23.R7 U24.C6 U24.E6 U24.F5 U24.J10 U24.K9 U24.M4 U24.N4 U24.P3 U24.P5 U25.8 U26.8 | length 5976
  Top Layer w10: C54.2@-210,1551.3 -210,1530 -206.91,1526.91 -206.91,1516.91 v1(-205,1515) ; v1(-150,1420) C53.2@-113.7,1420 ; v1(-110,1610) -110,1612.16 -101.3,1620.86 C55.2@-101.3,1650 ; J11.6@482.28,923.23 481.8,922.75 481.8,913.89 482.28,914.37 v1(482.28,985.24) ; v1(520,830) 520,866.46 541.34,887.8 ; J11.3@541.34,923.23 541.34,887.8 ; J11.2@561.02,923.23 561.02,893.65 555.17,887.8 541.34,887.8 ; J11.1@580.71,923.23 580.71,896.61 585.3,892.01 598.69,892.01 v1(600.42,893.74)
  Top Layer w14: C50.2@-1063.7,2765 -1063.7,2736.55 -1055.5,2728.35 -1025.28,2728.35 v1(-1023.62,2730) ; v1(-1023.62,2450.79) -1023.66,2450.75 -1023.66,2412.84 C49.2@-1020.82,2410 ; C43.2@-971.3,2530 -945,2530 ; v1@-945,2490.27 -945,2530 ; v1(-944.88,2490.16) -945,2490.04 -945,2450.9 v1(-944.88,2450.79) v1(-905.51,2450.79) ; v1(-944.88,2608.27) v1(-944.88,2568.9) -945,2568.78 -945,2530 ; C45.2@-918.7,2530 -945,2530 ; v1(-866.14,2411.42) -831.42,2411.42 -830,2410 ; v1(-866.14,2450.79) -865,2449.64 -849.84,2449.64 -830,2429.8 -830,2410 ; C48.2@-830,2378.7 -830,2410 ; C51.2@-825,2611.3 -823.12,2609.42 -788.55,2609.42 v1(-787.4,2608.27) v1(-748.03,2608.27) v1(-708.66,2608.27) v1(-708.66,2568.9) -709.81,2567.75 -709.81,2530.75 C46.2@-709.06,2530 ; C46.2@-711.3,2530 C46.2@-709.06,2530 ; C44.2@-669.29,2648.62 v1(-669.29,2687.01) ; C47.2@-668.7,2530 C46.2@-709.06,2530
  Bottom Layer w5: v1(-1058.07,3016.73) -1023.62,3016.73 U23.P2@-1007.87,3000.98 ; R42.1@-670.28,3553.82 R42.1@-670,3553.54 ; U23.B2@-629.92,3000.98 -614.17,3016.73 v1(-574.8,3016.73)
  Bottom Layer w6: v1(-150,1420) -149,1420 -131.65,1420 -125.79,1425.86 U24.P5@-125.79,1452.05 U24.N4@-106.1,1471.73 ; U24.M4@-106.1,1491.42 U24.N4@-106.1,1471.73 ; U24.P3@-86.42,1452.05 U24.N4@-106.1,1471.73
  Bottom Layer w10: v1(-1397.64,2900.59) -1399.41,2900.59 -1400,2900 R58.1@-1378.54,2900 ; v1(-1397.64,2949.8) -1399.8,2949.8 -1400,2950 R57.1@-1378.54,2950 ; v1(-1397.64,3000) -1400,3000 R55.1@-1378.54,3000 ; v1(-1397.64,3049.21) -1399.21,3049.21 -1400,3050 R56.1@-1378.54,3050 ; J10.1@-1241,1601 -1241,1595.32 -1249,1587.32 -1249,1484 v1(-1232,1467) ; v1(-1170.28,3408.46) -1170.14,3408.33 -1170.14,3383.68 R65.2@-1170,3383.54 ; R43.1@-725,3553.54 v1(-725,3574.41) ; R42.1@-670.28,3553.82 -670.14,3553.96 -670.14,3577.62 v1(-670.28,3577.76) ; R66.2@-560.02,3553.56 v1(-560.04,3581.69) ; R23.2@-446.46,-565 v2(-410,-565) ; R22.2@-446.46,-285 v2(-410,-285) ; R24.2@-446.46,-25 v2(-410,-25) ; U24.J10@-224.21,1550.47 -210.86,1550.47 -205,1544.61 -205,1531.26 U24.K9@-204.53,1530.79 -204.53,1515.47 v1(-205,1515) ; R77.2@-185,1928.54 v1(-185,1955) ; U24.C6@-145.47,1668.58 -145.47,1615.47 -139.53,1609.53 v1@-110.47,1609.53 ; R78.2@-130,1928.54 v1(-130,1955) ; U24.F5@-125.79,1609.53 v1@-110.47,1609.53 ; v1(-110,1610) v1@-110.47,1609.53 ; R79.2@-75,1928.54 v1(-75,1955) ; U6.5@42.4,839.29 42.4,892.12 34.52,900 70,900 85,915 v2(85,975) ; v2(60,1460) 61.46,1461.46 R80.2@95,1461.46 ; R76.2@95,1793.54 v1(95,1820) ; C24.1@250,1079.52 250,1120 257.02,1127.02 277.02,1127.02 v2(280,1130) 281.77,1131.77 U5.6@312.6,1131.77 ; v2(535,1670) J6.2@535,1700 ; v2(975,2170) 974.54,2169.54 974.54,2130 981.86,2122.68 981.86,2103.14 983.66,2101.34 U12.10@1035.63,2101.34 ; v2(1223.54,2121.46) R13.1@1223.54,2155 ; U18.5@1325.52,1097.6 1328.12,1095 v2(1367.29,1095)